# Altium PCB 101-0000212_UBERCLOCK_CRYSTAL_FILTER.PcbDoc
Units mm, origin at the board's own origin, x right, y up, seen from the top; angles counter-clockwise.
Board outline 100 x 100 mm, 4 copper layers (Top Layer, Layer 1, Layer 2, Bottom Layer), stack 1.586 mm thick; 55 components, 20 nets, 112 pads, 89 vias.
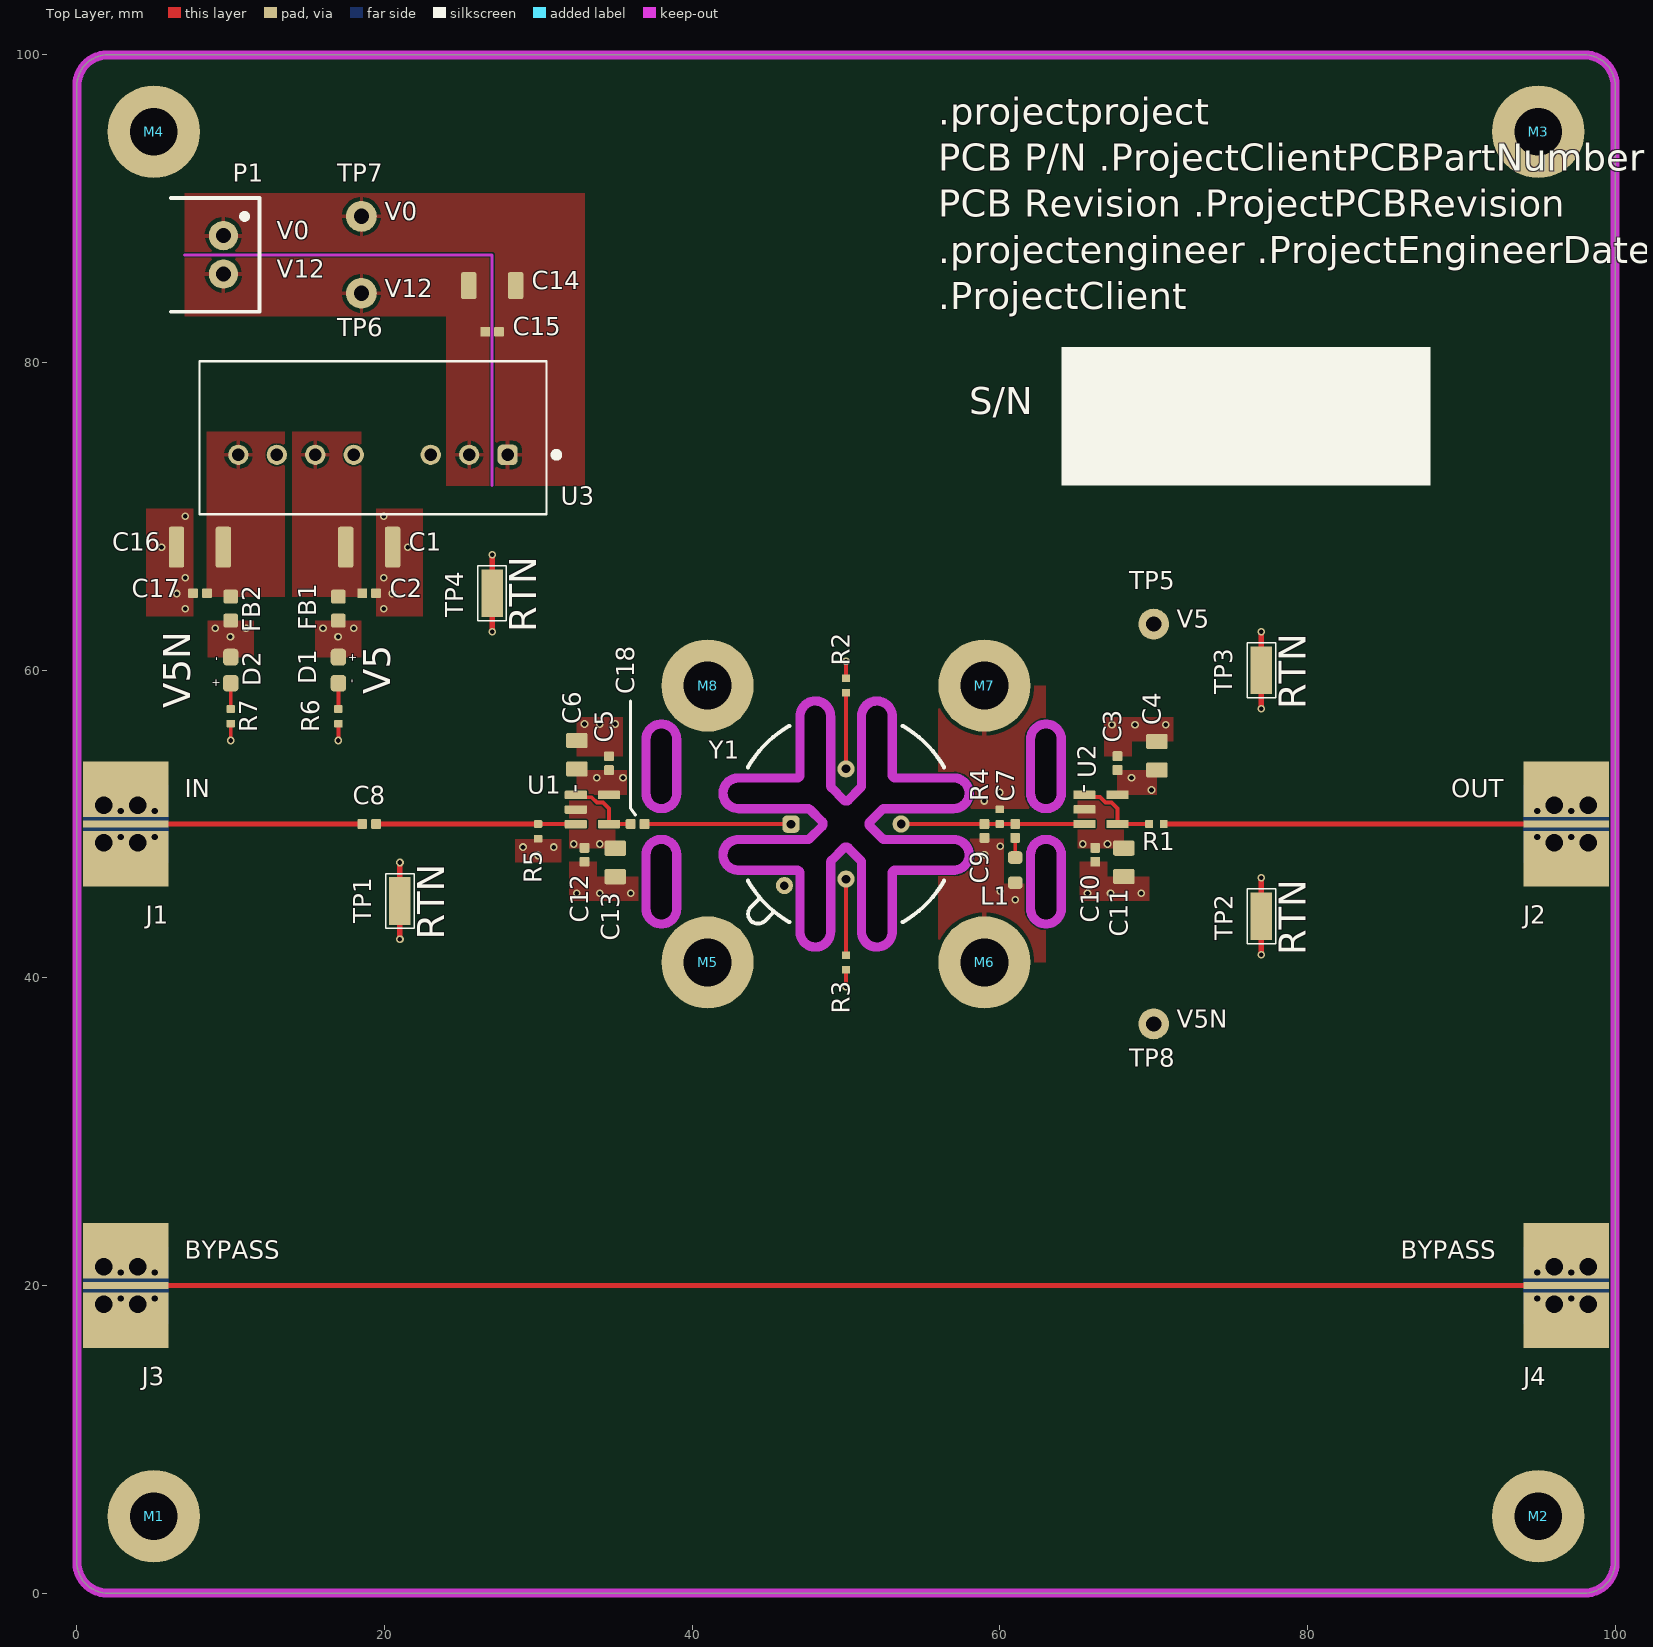
[diagram p0: Top Layer view]
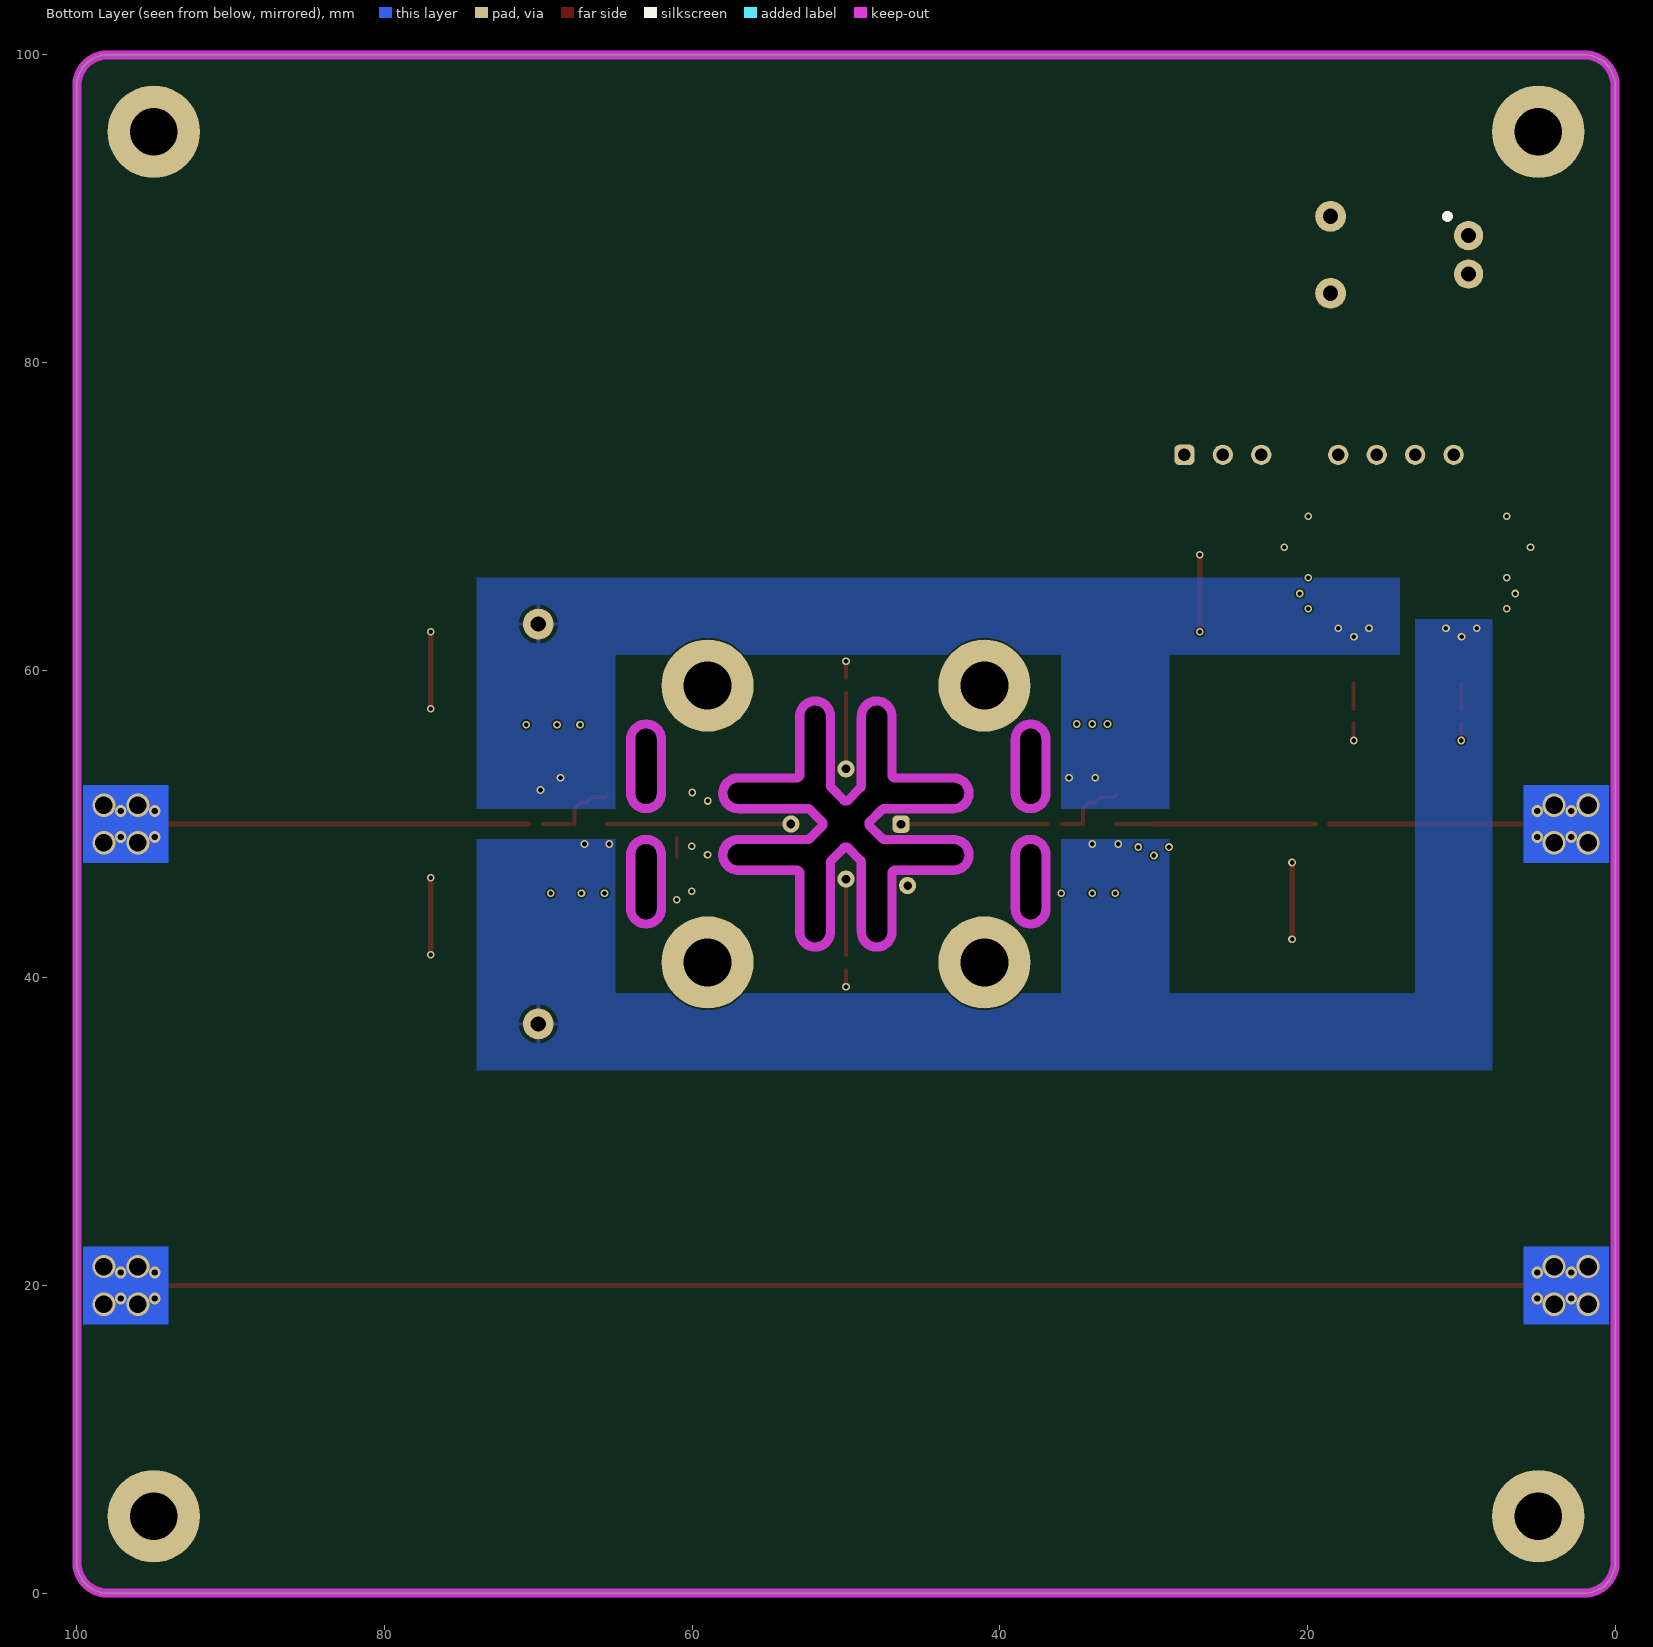
[diagram p1: Bottom Layer view, seen from below]
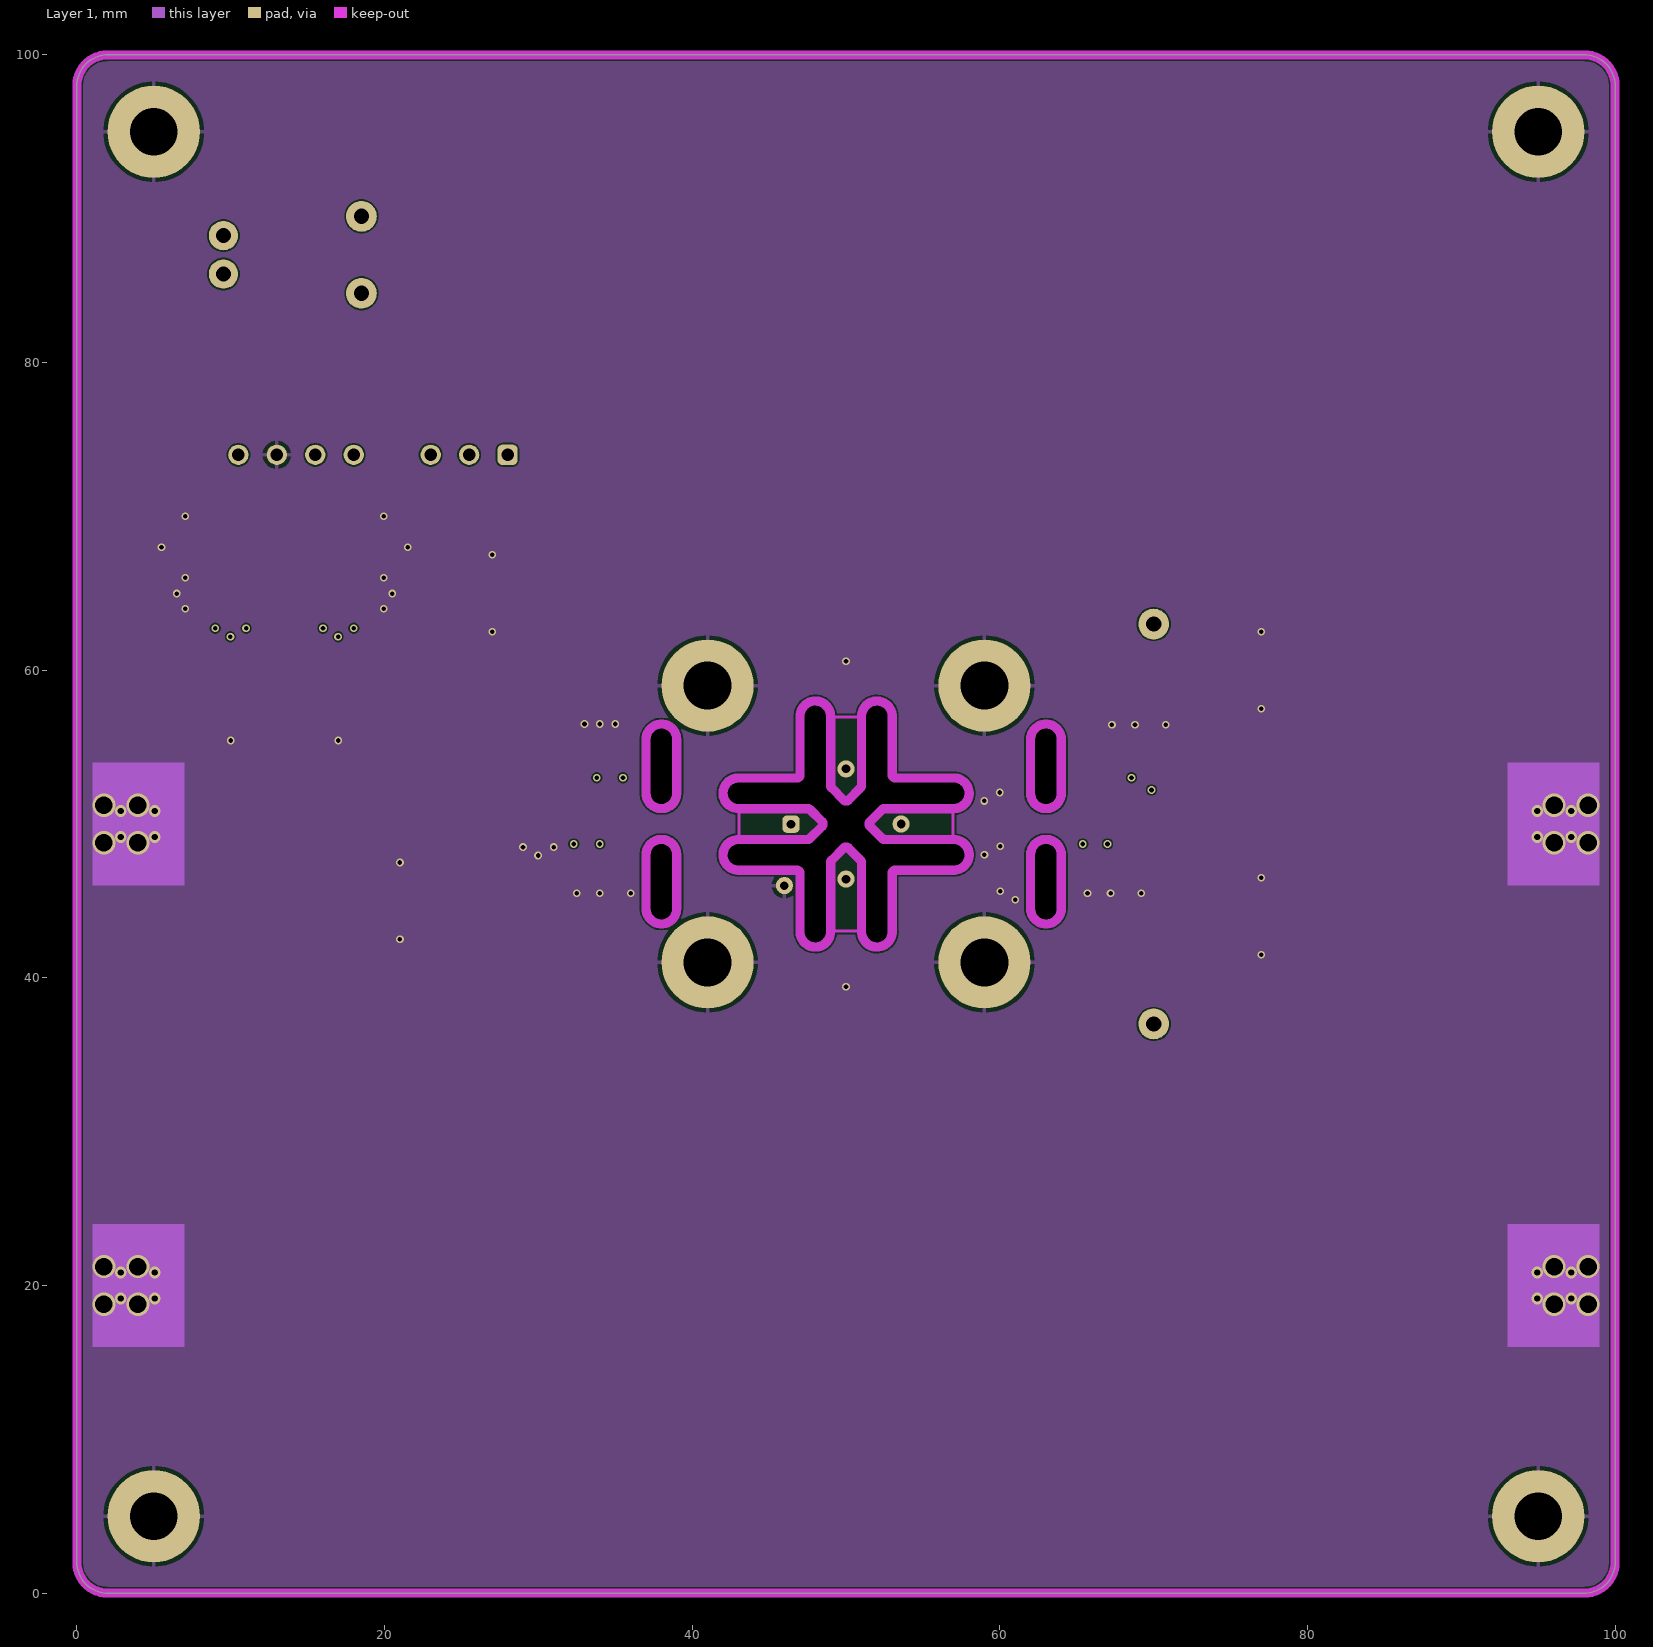
[diagram p2: Layer 1]
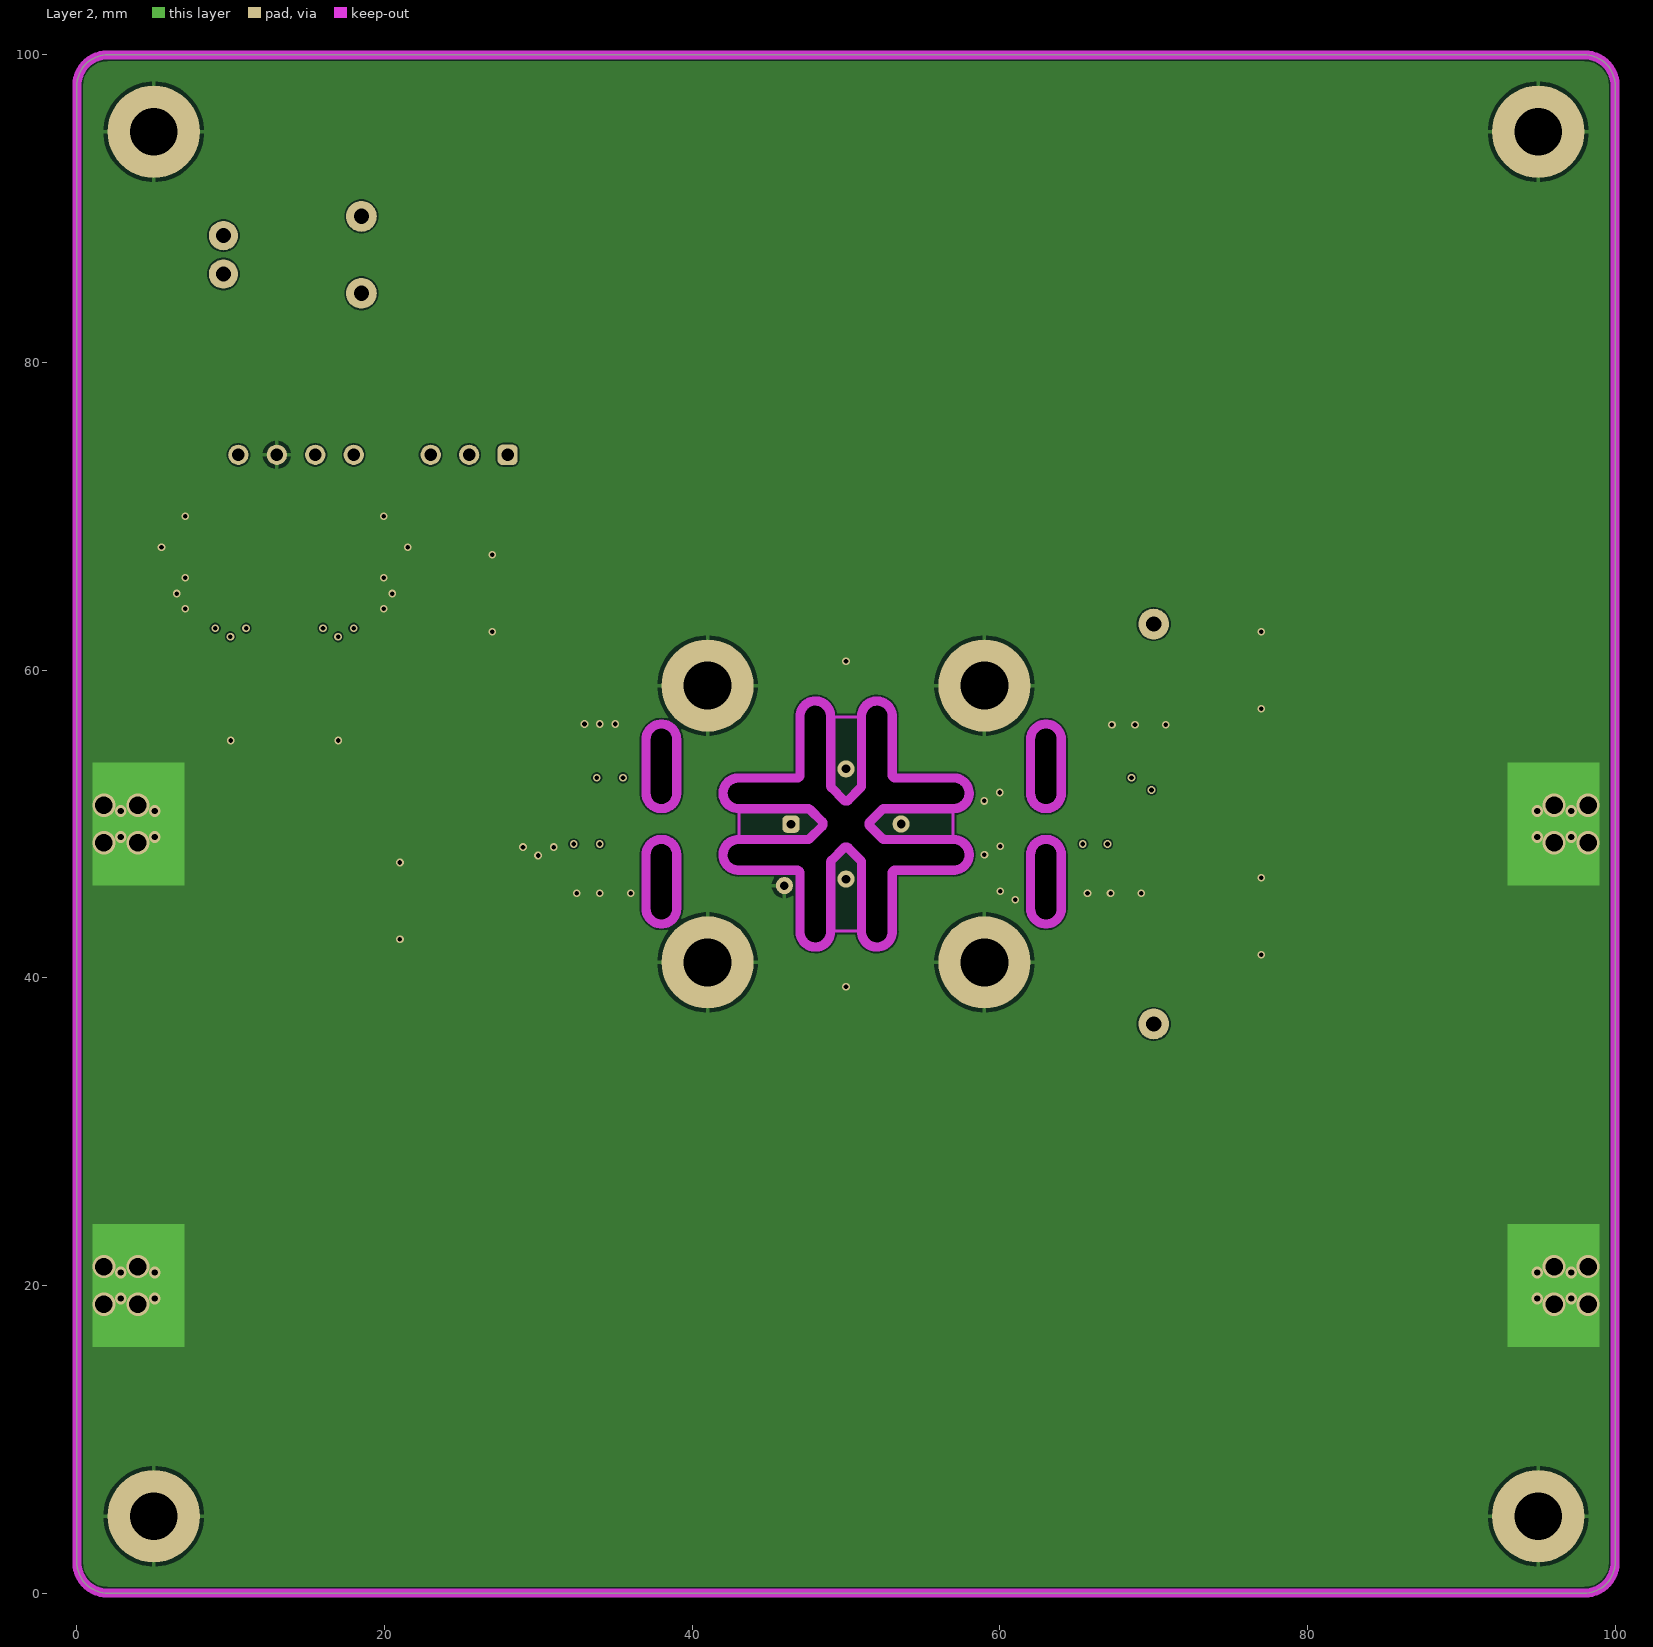
[diagram p3: Layer 2]
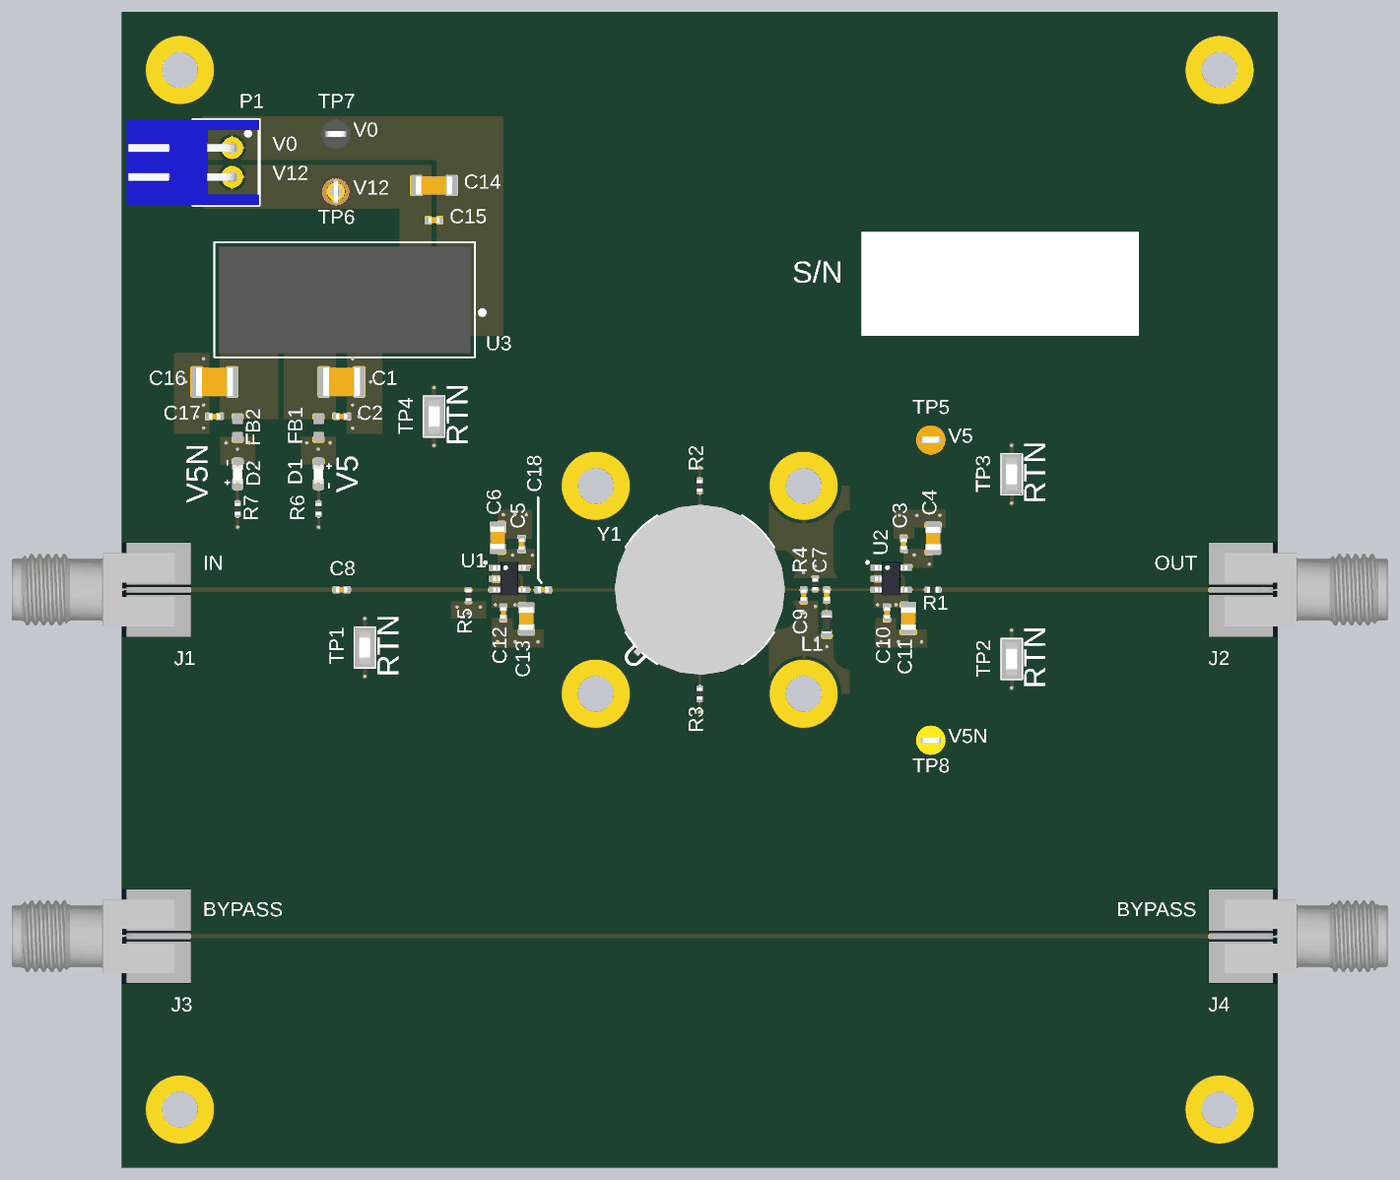
[diagram p4: 3D render of the assembled board from above, using the file's embedded part models]

## Layer stack, top to bottom
Top Solder: solder mask 0.0152, Solder Resist, Dk 3.8
Top Layer: signal copper 0.035
Prepreg 1: prepreg 0.2104, NP-155F, Dk 4.4
Layer 1: signal copper 0.0152
Core: core 1.065, NP-155F, Dk 4.43
Layer 2: signal copper 0.0152
Prepreg 2: prepreg 0.2104, NP-155F, Dk 4.4
Bottom Layer: signal copper 0.035
Bottom Solder: solder mask 0.0152, Solder Resist, Dk 3.8

## Board outline
0,2 ccw(c2,2) 2,0 98,0 ccw(c98,2) 100,2 100,98 ccw(c98,98) 98,100 2,100 ccw(c2,98) 0,98
cut-out: 37,44.5 ccw(c38,44.5) 39,44.5 39,48 ccw(c38,48) 37,48
cut-out: 37,52 ccw(c38,52) 39,52 39,55.5 ccw(c38,55.5) 37,55.5
cut-out: 62,52 62,55.5 cw(c63,55.5) 64,55.5 64,52 cw(c63,52)
cut-out: 62,44.5 ccw(c63,44.5) 64,44.5 64,48 ccw(c63,48) 62,48
cut-out: 42.252,47.341 cw(c42.998,47.996) 42.011,47.886 cw(c43.006,47.997) 42.006,47.957 cw(c43.015,47.997) 42.005,48.008 cw(c43.029,47.997) 42.006,48.049 cw(c43.044,47.996) 42.009,48.085 cw(c43.044,47.996) 42.012,48.117 cw(c43.059,47.994) 42.016,48.145 cw(c43.066,47.993) 42.02,48.172 cw(c43.071,47.992) 42.025,48.199 cw(c42.939,48.019) 42.098,48.421 cw(c42.949,48.014) 42.127,48.477 cw(c42.956,48.011) 42.153,48.52 cw(c42.966,48.004) 42.178,48.556 cw(c42.976,47.997) 42.202,48.59 cw(c42.983,47.992) 42.227,48.621 cw(c42.988,47.987) 42.253,48.651 cw(c42.992,47.984) 42.279,48.679 cw(c43.005,47.971) 42.308,48.707 cw(c43.012,47.964) 42.337,48.734 cw(c43.017,47.958) 42.37,48.762 cw(c43.024,47.95) 42.406,48.79 cw(c43.028,47.945) 42.449,48.819 cw(c43.037,47.932) 42.499,48.851 cw(c43.042,47.923) 42.568,48.888 cw(c43.048,47.91) 42.778,48.965 cw(c43.048,47.912) 43.048,48.999 47.51,48.999 ccw(c47.51,49.199) 47.651,49.057 48.453,49.856 ccw(c48.31,49.999) 48.46,49.863 ccw(c48.312,49.998) 48.469,50.121 ccw(c48.313,49.999) 48.46,50.131 ccw(c48.309,49.995) 48.453,50.139 47.655,50.937 ccw(c47.513,50.796) 47.513,50.996 43.048,50.996 cw(c43.048,52.085) 42.6,51.092 cw(c43.044,52.076) 42.519,51.133 cw(c43.037,52.064) 42.463,51.167 cw(c43.032,52.057) 42.418,51.197 cw(c43.027,52.05) 42.379,51.226 cw(c43.021,52.041) 42.345,51.254 cw(c43.011,52.03) 42.314,51.282 cw(c43.01,52.028) 42.285,51.31 cw(c43,52.018) 42.258,51.338 cw(c42.989,52.008) 42.233,51.367 cw(c42.984,52.004) 42.207,51.398 cw(c42.976,51.998) 42.182,51.432 cw(c42.969,51.993) 42.157,51.468 cw(c42.962,51.988) 42.132,51.51 cw(c42.941,51.977) 42.025,51.796 cw(c43.072,52.003) 42.02,51.819 cw(c43.059,52.001) 42.016,51.846 cw(c43.067,52.002) 42.012,51.874 cw(c43.055,52) 42.009,51.906 cw(c43.04,51.999) 42.006,51.942 cw(c43.029,51.998) 42.005,51.983 cw(c43.013,51.998) 42.005,52.034 cw(c42.995,51.999) 42.13,52.481 cw(c43.008,51.992) 42.386,52.781 cw(c43.005,51.996) 42.74,52.96 cw(c43.005,51.997) 42.888,52.989 cw(c43.006,51.985) 42.955,52.995 cw(c43.007,51.979) 43.007,52.996 46.807,52.996 ccw(c46.807,53.199) 46.817,52.996 ccw(c46.807,53.196) 47.006,53.172 ccw(c46.81,53.196) 47.007,53.185 ccw(c46.809,53.196) 47.007,53.196 47.007,56.997 cw(c48.029,56.997) 47.008,57.046 cw(c48.02,56.997) 47.014,57.116 cw(c48.005,56.999) 47.068,57.341 cw(c48.011,56.996) 47.348,57.75 cw(c48.005,57.005) 47.894,57.992 cw(c48.005,57.001) 47.965,57.998 cw(c48.005,56.991) 48.017,57.998 cw(c48.006,56.98) 48.058,57.997 cw(c48.006,56.981) 48.093,57.995 cw(c48.006,56.972) 48.125,57.991 cw(c48.003,56.949) 48.154,57.988 cw(c48.003,56.946) 48.18,57.983 cw(c48.003,56.945) 48.207,57.979 cw(c48.027,57.064) 48.428,57.905 cw(c48.024,57.057) 48.484,57.877 cw(c48.021,57.051) 48.527,57.851 cw(c48.017,57.044) 48.564,57.826 cw(c48.006,57.028) 48.597,57.802 cw(c48.001,57.022) 48.629,57.777 cw(c48.001,57.022) 48.658,57.752 cw(c47.997,57.016) 48.686,57.725 cw(c47.984,57.003) 48.714,57.697 cw(c47.978,56.996) 48.741,57.667 cw(c47.966,56.986) 48.769,57.634 cw(c47.962,56.982) 48.797,57.598 cw(c47.954,56.976) 48.827,57.556 cw(c47.942,56.968) 48.858,57.505 cw(c47.932,56.962) 48.895,57.436 cw(c47.918,56.955) 48.973,57.225 cw(c47.921,56.955) 49.007,56.956 49.007,52.49 ccw(c49.207,52.49) 49.066,52.348 49.864,51.55 ccw(c50.01,51.696) 49.872,51.543 ccw(c50.006,51.692) 50.129,51.534 ccw(c50.005,51.692) 50.14,51.543 ccw(c50.003,51.694) 50.147,51.55 50.946,52.352 ccw(c50.804,52.493) 51.004,52.493 51.004,56.956 cw(c52.093,56.955) 51.101,57.403 cw(c52.084,56.96) 51.141,57.484 cw(c52.074,56.965) 51.175,57.541 cw(c52.064,56.971) 51.206,57.586 cw(c52.054,56.979) 51.235,57.624 cw(c52.046,56.985) 51.263,57.659 cw(c52.036,56.994) 51.291,57.69 cw(c52.031,56.999) 51.319,57.718 cw(c52.025,57.005) 51.347,57.745 cw(c52.012,57.019) 51.376,57.771 cw(c52.012,57.02) 51.407,57.796 cw(c52.005,57.029) 51.44,57.821 cw(c51.999,57.038) 51.477,57.846 cw(c51.994,57.045) 51.518,57.871 cw(c51.985,57.062) 51.804,57.978 cw(c52.012,56.927) 51.829,57.983 cw(c52.011,56.93) 51.856,57.987 cw(c52.007,56.958) 51.884,57.991 cw(c52.006,56.97) 51.916,57.994 cw(c52.006,56.971) 51.952,57.997 cw(c52.006,56.983) 51.993,57.998 cw(c52.006,56.994) 52.045,57.998 cw(c52.008,57.008) 52.487,57.874 cw(c52,56.995) 52.791,57.616 cw(c52.005,56.998) 52.969,57.263 cw(c52.004,56.998) 52.997,57.116 cw(c51.994,56.997) 53.003,57.048 cw(c51.987,56.997) 53.004,56.997 53.004,53.196 ccw(c53.208,53.196) 53.005,53.186 ccw(c53.204,53.196) 53.18,52.997 ccw(c53.204,53.197) 53.194,52.996 ccw(c53.204,53.198) 53.204,52.996 57.005,52.996 cw(c57.005,51.974) 57.055,52.995 cw(c57.006,51.985) 57.124,52.989 cw(c57.007,51.998) 57.346,52.937 cw(c57.004,51.993) 57.76,52.654 cw(c57.014,51.998) 58.001,52.109 cw(c57.006,51.998) 58.006,52.038 cw(c56.998,51.998) 58.007,51.987 cw(c56.988,51.998) 58.005,51.946 cw(c56.974,51.998) 58.003,51.91 cw(c56.962,51.999) 58,51.878 cw(c56.952,52.001) 57.996,51.849 cw(c56.953,52) 57.992,51.823 cw(c56.927,52.005) 57.987,51.796 cw(c57.072,51.976) 57.914,51.575 cw(c57.063,51.981) 57.885,51.519 cw(c57.057,51.984) 57.859,51.476 cw(c57.044,51.992) 57.835,51.439 cw(c57.044,51.992) 57.81,51.406 cw(c57.037,51.997) 57.785,51.375 cw(c57.021,52.01) 57.76,51.345 cw(c57.017,52.013) 57.734,51.317 cw(c57.008,52.022) 57.705,51.289 cw(c57.001,52.029) 57.675,51.262 cw(c56.999,52.031) 57.643,51.234 cw(c56.989,52.043) 57.606,51.206 cw(c56.981,52.054) 57.564,51.177 cw(c56.977,52.059) 57.513,51.145 cw(c56.969,52.073) 57.445,51.108 cw(c56.964,52.085) 57.234,51.03 cw(c56.964,52.083) 56.964,50.996 52.498,50.996 ccw(c52.498,50.796) 52.357,50.937 51.559,50.139 ccw(c51.704,49.994) 51.552,50.132 ccw(c51.7,49.998) 51.543,49.874 ccw(c51.701,49.999) 51.552,49.864 ccw(c51.704,50.002) 51.559,49.856 52.36,49.057 ccw(c52.501,49.199) 52.501,48.999 56.964,48.999 cw(c56.963,47.91) 57.412,48.903 cw(c56.968,47.919) 57.493,48.862 cw(c56.973,47.929) 57.549,48.828 cw(c56.981,47.941) 57.594,48.798 cw(c56.987,47.949) 57.633,48.769 cw(c56.996,47.961) 57.667,48.74 cw(c57.003,47.968) 57.698,48.713 cw(c57.014,47.979) 57.727,48.685 cw(c57.021,47.986) 57.753,48.657 cw(c57.026,47.989) 57.779,48.628 cw(c57.031,47.994) 57.804,48.596 cw(c57.038,47.999) 57.829,48.563 cw(c57.046,48.005) 57.854,48.527 cw(c57.057,48.011) 57.879,48.485 cw(c57.071,48.018) 57.987,48.199 cw(c56.923,47.989) 57.991,48.176 cw(c56.949,47.994) 57.995,48.149 cw(c56.971,47.997) 57.999,48.121 cw(c56.977,47.997) 58.003,48.089 cw(c56.987,47.997) 58.005,48.053 cw(c56.988,47.997) 58.007,48.012 cw(c56.999,47.997) 58.006,47.96 cw(c57.017,47.996) 57.882,47.514 cw(c57.004,48.003) 57.624,47.212 cw(c57.006,47.999) 57.272,47.035 cw(c57.007,47.999) 57.124,47.006 cw(c57.005,48.012) 57.057,47 cw(c57.005,48.02) 57.005,46.999 53.204,46.999 ccw(c53.204,46.8) 53.194,46.999 ccw(c53.204,46.799) 53.006,46.823 ccw(c53.203,46.799) 53.005,46.809 ccw(c53.206,46.799) 53.004,46.799 53.004,42.998 cw(c51.987,42.998) 53.003,42.948 cw(c51.993,42.998) 52.997,42.879 cw(c52.006,42.996) 52.946,42.659 cw(c52.001,42.999) 52.662,42.243 cw(c52.007,42.989) 52.117,42.003 cw(c52.007,42.996) 52.046,41.997 cw(c52.006,43.006) 51.995,41.996 cw(c52.006,43.019) 51.954,41.998 cw(c52.007,43.027) 51.918,42 cw(c52.007,43.034) 51.886,42.003 cw(c52.01,43.057) 51.858,42.007 cw(c52.009,43.051) 51.831,42.011 cw(c52.014,43.082) 51.804,42.016 cw(c51.984,42.931) 51.582,42.09 cw(c51.988,42.939) 51.527,42.119 cw(c51.994,42.949) 51.484,42.145 cw(c51.998,42.956) 51.447,42.169 cw(c52.005,42.966) 51.413,42.194 cw(c52.011,42.973) 51.382,42.219 cw(c52.016,42.979) 51.353,42.244 cw(c52.028,42.993) 51.324,42.271 cw(c52.032,42.997) 51.296,42.299 cw(c52.039,43.004) 51.269,42.329 cw(c52.047,43.01) 51.242,42.362 cw(c52.054,43.016) 51.214,42.398 cw(c52.063,43.022) 51.184,42.44 cw(c52.072,43.029) 51.153,42.491 cw(c52.082,43.034) 51.116,42.56 cw(c52.093,43.04) 51.038,42.77 cw(c52.091,43.039) 51.004,43.039 51.004,47.502 ccw(c50.804,47.502) 50.946,47.643 50.147,48.444 ccw(c50.009,48.307) 50.14,48.451 ccw(c50.006,48.303) 49.882,48.461 ccw(c50.005,48.304) 49.872,48.452 ccw(c50.007,48.301) 49.864,48.445 49.066,47.647 ccw(c49.207,47.505) 49.007,47.505 49.007,43.039 cw(c47.918,43.04) 48.911,42.592 cw(c47.928,43.035) 48.87,42.51 cw(c47.938,43.03) 48.836,42.454 cw(c47.946,43.024) 48.806,42.409 cw(c47.957,43.017) 48.777,42.37 cw(c47.965,43.01) 48.749,42.336 cw(c47.971,43.005) 48.721,42.305 cw(c47.986,42.991) 48.693,42.276 cw(c47.99,42.986) 48.665,42.25 cw(c47.992,42.984) 48.636,42.224 cw(c47.999,42.975) 48.605,42.199 cw(c48.005,42.968) 48.572,42.174 cw(c48.012,42.958) 48.535,42.149 cw(c48.017,42.951) 48.493,42.124 cw(c48.027,42.932) 48.207,42.016 cw(c48,43.065) 48.184,42.012 cw(c48.001,43.064) 48.158,42.008 cw(c48.002,43.053) 48.129,42.004 cw(c48.004,43.042) 48.097,42.001 cw(c48.004,43.032) 48.061,41.998 cw(c48.005,43.017) 48.02,41.997 cw(c48.006,43.009) 47.969,41.997 cw(c48.004,42.987) 47.523,42.121 cw(c48.011,42.999) 47.222,42.378 cw(c48.007,42.997) 47.043,42.731 cw(c48.007,42.996) 47.014,42.879 cw(c48.019,42.998) 47.008,42.947 cw(c48.028,42.998) 47.007,42.998 47.007,46.799 ccw(c46.804,46.799) 47.007,46.809 ccw(c46.807,46.799) 46.832,46.997 ccw(c46.808,46.802) 46.818,46.999 ccw(c46.807,46.801) 46.807,46.999 43.007,46.999 cw(c43.007,48.02) 42.957,47 cw(c43.006,48.012) 42.888,47.006 cw(c43.004,47.997) 42.667,47.057 cw(c43.007,48.002)

## Design rules (kind name [scope] priority, off if disabled: settings)
Clearance [All] p1: gap=0.1 ignorepadtopadclearanceinfootprint=FALSE
HoleSize [All] p1: absolutevalues=TRUE maxlimit=25.4 minlimit=0.254 maxpercent=80.000 minpercent=20.000
MinimumAnnularRing [All] p1: minimumring=0.1
MinimumSolderMaskSliver [All] p1: minsoldermaskwidth=0.1
PolygonConnect [All] p1: thpad.connectstyle=Relief thpad.reliefconductorwidth=0.254 thpad.reliefentries=4 thpad.polygonreliefangle="90 Angle" thpad.airgapwidth=0.254 smdpad.connectstyle=Direct smdpad.reliefconductorwidth=0.254 smdpad.reliefentries=4 smdpad.polygonreliefangle="90 Angle" smdpad.airgapwidth=0.254 via.connectstyle=Direct via.reliefconductorwidth=0.254 via.reliefentries=4 via.polygonreliefangle="90 Angle" via.airgapwidth=0.254
RoutingVias [All] p1: holewidth=0.254 width=0.508 viastyle="Through Hole" minholewidth=0.254 minwidth=0.508 maxholewidth=0.711 maxwidth=1.27
SilkToSilkClearance [All] p1: silktosilkclearance=0.1
SilkToSolderMaskClearance SilkscreenOverComponentPads [IsPad] p1: minsilkscreentomaskgap=0.1 clearancetoexposedcopper=TRUE
SolderMaskExpansion [All] p1: expansion=0.05 istentingtop=FALSE
Width "50-Ohm TL" [InNetClass('Z50')] p1: maxlimit=0.349 minlimit=0.254 preferedwidth=0.349 toplayer_minwidth=0.349 bottomlayer_minwidth=0.349 impedanceprofiledriven=TRUE impedanceprofileid={C1B0F405-1A36-49F5-8AF3-67B6DDAB0612} impedanceprofilevalue=50.000000 minimp=50.000000 maximp=50.000000 favimp=50.000000
Width [All] p2: maxlimit=500 minlimit=0.1 preferedwidth=0.1
26 further rules are at their usual default settings.

## Components (designator, comment, footprint, x,y, rotation, side; value= is the part's Value field where it differs from the comment)
C1 "CGA6P1X7S1A476M250AC" CAPC3225X25N 19,68 r180 top value=47uF
C2 "CGA2B3X7R1V104K050BB" CAPC1005X05N 19,65 r0 top value=100nF
C3 "CGA2B3X7R1V104K050BB" CAPC1005X05N 67.65,53.96 r90 top value=100nF
C4 "CGA4J3X5R1E475K125AB" CAPC2012X125N 70.212,54.435 r270 top value=4.7uF
C5 "CGA2B3X7R1V104K050BB" CAPC1005X05N 34.588,53.95 r90 top value=100nF
C6 "CGA4J3X5R1E475K125AB" CAPC2012X125N 32.5,54.5 r270 top value=4.7uF
C7 "CGA2B2C0G1H180J050BA" CAPC1005X05N 61,49.55 r90 top value=18pF
C8 "CGA2B3X7R1V104K050BB" CAPC1005X05N 19,50 r180 top value=100nF
C9 "CGA2B2C0G1H180J050BA" CAPC1005X05N 59,49.55 r90 top value=18pF
C10 "CGA2B3X7R1V104K050BB" CAPC1005X05N 66.2,48 r270 top value=100nF
C11 "CGA4J3X5R1E475K125AB" CAPC2012X125N 68.062,47.51 r90 top value=4.7uF
C12 "CGA2B3X7R1V104K050BB" CAPC1005X05N 33,48 r270 top value=100nF
C13 "CGA4J3X5R1E475K125AB" CAPC2012X125N 35,47.5 r90 top value=4.7uF
C14 "CGA5L3X5R1V106M160AB" CAPC3216X16N 27,85 r180 top value=10uF
C15 "CGA2B3X7R1V104K050BB" CAPC1005X05N 27,82 r0 top value=100nF
C16 "CGA6P1X7S1A476M250AC" CAPC3225X25N 8,68 r0 top value=47uF
C17 "CGA2B3X7R1V104K050BB" CAPC1005X05N 8,65 r180 top value=100nF
C18 "CGA2B3X7R1V104K050BB" CAPC1005X05N 36.45,50 r180 top value=100nF
D1 "LTST-C191KGKT" 0603_LED 17,60 r270 top
D2 "LTST-C191KGKT" 0603_LED 10,60 r90 top
FB1 "BLM18AG102SN1" INDC1608X08N#1 17,64 r270 top
FB2 "BLM18AG102SN1" INDC1608X08N#1 10,64 r270 top
J1 "#NAME?" 901-10510-1 0,50 r180 top
J2 "#NAME?" 901-10510-1 100,50 r0 top
J3 "#NAME?" 901-10510-1 0,20 r180 top
J4 "#NAME?" 901-10510-1 100,20 r0 top
L1 "LQW18AN68NJ00D" INDC1608X08N#2 61,47 r270 top value=68nH
M1 "MOUNTM3" MOUNTM3 5,5 r0 top locked
M2 "MOUNTM3" MOUNTM3 95,5 r0 top locked
M3 "MOUNTM3" MOUNTM3 95,95 r0 top locked
M4 "MOUNTM3" MOUNTM3 5,95 r0 top locked
M5 "MOUNTM3" MOUNTM3 41,41 r0 top locked
M6 "MOUNTM3" MOUNTM3 59,41 r0 top locked
M7 "MOUNTM3" MOUNTM3 59,59 r0 top locked
M8 "MOUNTM3" MOUNTM3 41,59 r0 top locked
P1 "S2B-XH-A" S2B-XH-A 9,87 r270 top
R1 "ERJ-2RKF49R9X" RESC1005X035N 70.175,50 r180 top value=49.9
R2 "ERJ-2RKF1004X" RESC1005X035N 50,59 r90 top value=1M
R3 "ERJ-2RKF1004X" RESC1005X035N 50,41 r270 top value=1M
R4 "ERJ-2RKF1004X" RESC1005X035N 60,50.475 r270 top value=1M
R5 "ERJ-2RKF49R9X" RESC1005X035N 29.981,49.525 r90 top value=49.9
R6 "ERJ-2RKF1001X" RESC1005X035N 17,57 r270 top value=1k
R7 "ERJ-2RKF1001X" RESC1005X035N 10,57 r270 top value=1k
TP1 "5015" 5015 21,45 r90 top
TP2 "5015" 5015 77,44 r90 top
TP3 "5015" 5015 77,60 r90 top
TP4 "5015" 5015 27,65 r90 top
TP5 "#NAME?" 5003 70,63 r0 top
TP6 "#NAME?" 5000 18.5,84.5 r0 top
TP7 "#NAME?" 5001 18.5,89.5 r0 top
TP8 "#NAME?" 5004 70,37 r0 top
U1 "AD8065ARTZ-REEL7" SOT23-5 33.513,50.94 r270 top
U2 "AD8065ARTZ-REEL7" SOT23-5 66.575,50.95 r270 top
U3 "DPBW03F-05" SPBW03F-05_MWU 28,74 r180 top
Y1 "311205346" 311205346 50,50 r180 top

## Footprints (in the part's own frame and the unit in brackets; to place one, negate y for a bottom-side part, rotate by r counter-clockwise, add the part's x,y. Pads: shape width x height; smd on the part's side, far side on the other; paste and mask are expansions set on the pad)
0603_LED [mm] "SMD; Body 1.6 x 0.9 mm (LxW typ)"
  rrect50% 1.1x1 smd: 1(-0.85,0) 2(0.85,0)
  body extent -0.8,-0.4 0.8,0.4, height 0.55
901-10510-1 [mm] "SMA Board Edge Connector Female"
  rect 5.54x0.483 smd mask-0.241: 1(-3.17,0)
  rect 5.54x3.61 smd mask+0.05: 2(-3.17,2.26) 2(-3.17,-2.26)
  Bottom Layer region: -5.94,-2.54 -0.4,-2.54 -0.4,2.54 -5.94,2.54
  body extent -4.55,-3.18 9.53,3.17, height 3.3
5000 [mm] "Thruhole Mount Test Point, 4.6mm Tall, Red"
  round 2 hole 1: 1(0,0)
  body extent -1.27,-1.3 1.27,1.24, height 4.89
5001 [mm] "Thruhole Mount Test Point, 4.6mm Tall, Black"
  round 2 hole 1: 1(0,0)
  body extent -1.27,-1.3 1.27,1.24, height 4.57
5003 [mm] "Thruhole Mount Test Point, 4.6mm Tall, Orange"
  round 2 hole 1: 1(0,0)
  body extent -1.27,-1.3 1.27,1.24, height 4.57
5004 [mm] "Thruhole Mount Test Point, 4.6mm Tall, Yellow"
  round 2 hole 1: 1(0,0)
  body extent -1.27,-1.3 1.27,1.24, height 4.57
5015 [mm] "Test Point SMT"
  rect 3.1x1.4 smd paste+0.2 mask+0.05: 1(0,0)
  silkscreen extent -1.78,-0.92 1.78,0.92, body extent -1.45,-0.5 1.45,0.5, height 2
311205346 [mil]
  rrect50% 44x44 hole 22: 1(140.73,0.4)
  round 44 hole 22: 2(0,-141) 3(-141,0) 4(0,141) 5(157.61,157.61)
  silkscreen extent -251,-251 251,255, body extent -290,-290 289,290, height 312
CAPC1005X05N [mm] "Chip Capacitor, 2-Leads, Body 1.00x0.50mm, IPC Medium Density"
  rrect25% 0.64x0.64 smd mask+0.05: 1(-0.45,0) 2(0.45,0)
  body extent -0.5,-0.25 0.5,0.25, height 0.5
CAPC2012X125N [mm] "Chip Capacitor, 2-Leads, Body 2.00x1.25mm, IPC Medium Density"
  rrect25% 1x1.4 smd mask+0.05: 1(-0.925,0) 2(0.925,0)
  body extent -1,-0.63 1,0.63, height 1.25
CAPC3216X16N [mm] "Chip Capacitor, 2-Leads, Body 3.20x1.60mm, IPC Medium Density"
  rrect25% 1x1.75 smd mask+0.05: 1(-1.525,0) 2(1.525,0)
  body extent -1.6,-0.8 1.6,0.8, height 1.6
CAPC3225X25N [mm] "Chip Capacitor, 2-Leads, Body 3.20x2.50mm, IPC Medium Density"
  rrect25% 1x2.65 smd mask+0.05: 1(-1.525,0) 2(1.525,0)
  body extent -1.6,-1.25 1.6,1.25, height 2.5
INDC1608X08N#1 [mm] "Chip Inductor, 2-Leads, Body 1.60x0.80mm, IPC Medium Density"
  rrect25% 0.9x0.94 smd mask+0.05: 1(-0.78,0) 2(0.78,0)
  body extent -0.8,-0.4 0.8,0.4, height 0.8
INDC1608X08N#2 [mm] "Chip Inductor, 2-Leads, Body 1.60x0.80mm, IPC Medium Density"
  rrect50% 0.82x0.94 smd mask+0.05: 1(-0.82,0) 2(0.82,0)
  body extent -0.8,-0.4 0.8,0.4, height 0.8
MOUNTM3 [mm]
  round 6 hole 3.1 paste-2539.97 mask-0.064: 1(0,0)
RESC1005X035N [mm] "Chip Resistor, 2-Leads, Body 1.00x0.50mm, IPC Medium Density"
  rrect25% 0.5x0.55 smd mask+0.05: 1(-0.475,0) 2(0.475,0)
  body extent -0.5,-0.25 0.5,0.25, height 0.35
S2B-XH-A [mm] "2.5mm pitch right angle 2-position"
  round 1.905 hole 0.965: 1(-1.25,0.525) 2(1.25,0.525)
  silkscreen extent -3.7,-2.88 3.7,2.88, body extent -3.7,-8.62 3.7,2.88, height 5.95
SOT23-5 [mm] "SOT-23/SC-74A; 5 Leads; Body 3 x 3 mm, inc. leads (LxW max)"
  rrect25% 0.55x1.45 smd mask+0.05: 1(-0.95,-1.075) 2(0,-1.075) 3(0.95,-1.075) 4(0.95,1.075) 5(-0.95,1.075)
  body extent -1.45,-1.4 1.45,1.4, height 1.45
SPBW03F-05_MWU [mil]
  rrect50% 52x52 hole 32 paste-99999 mask+0: 1(0,0)
  round 52 hole 32 paste-99999 mask+0: 2(98.43,0) 3(196.85,0) 5(393.7,0) 6(492.13,0) 7(590.55,0) 8(688.98,0)
  silkscreen extent -130,-240 788,152, body extent -85,-224 773,138, height 437

## Part data
C1 C16: "CAPACITOR CERAMIC 47UF 20% 10V X7S 1210", Tolerance=20%, Voltage=10V, MFG=TDK, MPN=CGA6P1X7S1A476M250AC, Qual=AEC-Q200, TCR=+/-22%, Tr=–55:125
C2 C3 C5 C8 C10 C12 C15 C17 C18: "CAPACITOR CERAMIC 100NF 10% 35V X7R 0402", Package=0402, Tolerance=10%, Voltage=35V, MFG=TDK, MPN=CGA2B3X7R1V104K050BB, Qual=AEC-Q200, TCR=+/-15%, Tr=–55:125
C4 C6 C11 C13: "CAPACITOR CERAMIC 4.7UF 10% 25V X5R 0805", Tolerance=10%, Voltage=25V, MFG=TDK, MPN=CGA4J3X5R1E475K125AB, Qual=AEC-Q200, TCR=+/-15%, Tr=–55:85
C7 C9: "CAPACITOR CERAMIC 18PF 5% 50V C0G 0402", Package=0402, Tolerance=5%, Voltage=50V, MFG=TDK, MPN=CGA2B2C0G1H180J050BA, Qual=AEC-Q200, TCR=+/-30, Tr=–55:125
C14: "CAPACITOR CERAMIC 10UF 20% 35V X5R 1206", Tolerance=20%, Voltage=35V, MFG=TDK, MPN=CGA5L3X5R1V106M160AB, Qual=AEC-Q200, TCR=+/-15%, Tr=–55:85
D1 D2: "LED GREEN CLEAR SMD", Color=Green, MFG="LITE-ON INC", MPN=LTST-C191KGKT
FB1 FB2: "FERRITE BEAD 1000-OHM 450MA 0603", Current=450mA, DCR=0.5, Imedance="1000-OHM @ 100MHz", MFG=MURATA, MPN=BLM18AG102SN1, Tr=-55:125
J1 J2 J3 J4: library part 901-10510-1, "SMA Board Edge Connector Female", MFG=AMPHENOL, MPN=901-10510-1, Notes="SMA Female Receptacle"
L1: "FIXED IND 68NH 340MA 0.38OHM SMD", Package=0603, MFG=MURATA, MPN=LQW18AN68NJ00D
M1 M2 M3 M4 M5 M6 M7 M8: "M3 MOUNTING HOLE"
P1: "CONN HEADER R/A 2POS 2.5MM", MFG=JST, MPN=S2B-XH-A
R1 R5: "RESISTOR THICK FILM 49.9 OHM 1% 0402", Package=0402, Tolerance=1%, Voltage=50V, MFG=PANASONIC, MPN=ERJ-2RKF49R9X, Qual="AEC-Q200 GRADE 0", TCR=+/-100, Tr=-55:155
R2 R3 R4: "RESISTOR THICK FILM 1M OHM 1% 0402", Package=0402, Tolerance=1%, Voltage=50V, MFG=PANASONIC, MPN=ERJ-2RKF1004X, Qual="AEC-Q200 GRADE 0", TCR=+/-100, Tr=-55:155
R6 R7: "RESISTOR THICK FILM 1k OHM 1% 0402", Tolerance=1%, Voltage=50V, MFG=PANASONIC, MPN=ERJ-2RKF1001X, Qual="AEC-Q200 GRADE 0", TCR=+/-100, Tr=-55:155
TP1 TP2 TP3 TP4: "TEST POINT SMD", MFG=KEYSTONE, MPN=5015
TP5: library part 5003, "THRUHOLE MOUNT TEST POINT, 4.6MM TALL, ORANGE", MFG=KEYSTONE, MPN=5003, Notes=Orange
TP6: library part 5000, "THRUHOLE MOUNT TEST POINT, 4.6MM TALL, RED", MFG=KEYSTONE, MPN=5000, Notes=Red
TP7: library part 5001, "THRUHOLE MOUNT TEST POINT, 4.6MM TALL, BLACK", MFG=KEYSTONE, MPN=5001, Notes=Black
TP8: library part 5004, "THRUHOLE MOUNT TEST POINT, 4.6MM TALL, YELLOW", MFG=KEYSTONE, MPN=5004, Notes=Yellow
U1 U2: "IC OPAMP VFB 1 CIRCUIT SOT23-5", MFG="ANALOG DEVICES", MPN=AD8065ARTZ-REEL7
U3: library part SPBW03F-05, "DC DC CONVERTER +/-5V 3W", MFG="MEAN WELL", MPN=DPBW03F-05
Y1: "CUSTOM CRYSTAL RESONATOR", MFG=VECTRON, MPN=311205346

## Via types
v1: diameter 0.5, hole 0.3, Top Layer to Bottom Layer, tented top, 57 vias
v2: diameter 0.77, hole 0.4, Top Layer to Bottom Layer, tented bottom, 16 vias
v3: diameter 1.5, hole 1.14, Top Layer to Bottom Layer, 16 vias

## Nets (pads, with @x,y where several pads share a name; then routed paths per layer and width w, separated by ;. In a path a pad name is that pad's centre, name@x,y a point inside that pad or via, vN(x,y) a via of type N, cw(c..) or ccw(c..) an arc to the next point about the centre after c; other vN are vias at no path point)
BYPASS: J3.1 J4.1 | length 93.7
  Top Layer w0.349: J3.1 J4.1
NetC1_2: C1.2 C2.1 FB1.1 U3.6
NetC7_1: C7.1 L1.1 | length 1.3
  Top Layer w0.254: L1.1 C7.1
NetC8_1: C8.1 R5.2 U1.3 | length 13
  Top Layer w0.254: R5.2@29.986,49.995 32.433,49.995 U1.3
  Top Layer w0.349: C8.1 R5.2 R5.2@29.986,49.995
NetC16_2: C16.2 C17.1 FB2.1 U3.8
NetD1_2: D1.2 R6.1 | length 1.7
  Top Layer w0.254: R6.1 D1.2
NetD2_1: D2.1 R7.1 | length 1.7
  Top Layer w0.254: R7.1 D2.1
NetR2_1: R2.1 Y1.2 | length 4.9
  Top Layer w0.254: Y1.2 R2.1
NetR3_1: R3.1 Y1.4 | length 4.9
  Top Layer w0.254: R3.1 Y1.4
RTN: C1.1 C2.2 C3.2 C4.1 C5.2 C6.1 C9.1 C10.2 C11.1 C12.2 C13.1 C16.1 C17.2 J1.2 J2.2 J3.2 J4.2 L1.2 M1.1 M2.1 M3.1 M4.1 M5.1 M6.1 M7.1 M8.1 R2.2 R3.2 R4.1 R5.1 R6.2 R7.2 TP1.1 TP2.1 TP3.1 TP4.1 U3.7 Y1.5 | length 24.4
  Top Layer w0.254: v1(10,55.425) R7.2 ; v1(17,55.425) R6.2 ; v1(50,39.425) R3.2 ; R2.2 v1(50,60.575)
  Top Layer w0.349: v1(21,42.5) TP1.1 v1(21,47.5) ; v1(27,62.5) TP4.1 v1(27,67.5) ; v1(77,41.5) TP2.1 v1(77,46.5) ; v1(77,57.5) TP3.1 v1(77,62.5)
  other v1: 61,45.08 32.5,45.5 34,45.5 36,45.5 65.7,45.5 67.2,45.5 69.2,45.5 60.019,45.63 29.981,47.95 59,48 29,48.5 31,48.5 60.019,48.55 58.981,51.5 60,52.05 67.288,56.45 68.788,56.45 70.788,56.45 33,56.5 34,56.5 35,56.5 7.05,64 19.95,64 6.5,64.981 20.5,64.981 7.05,66 19.95,66 5.5,68 21.5,68 7.05,70 19.95,70
  other v2: 2.855,19.16 5.065,19.16 94.935,19.16 97.145,19.16 2.855,20.84 5.065,20.84 94.935,20.84 97.145,20.84 2.855,49.16 5.065,49.16 94.935,49.16 97.145,49.16 2.855,50.84 5.065,50.84 94.935,50.84 97.145,50.84
  other v3: 1.75,18.78 3.96,18.78 96.04,18.78 98.25,18.78 1.75,21.22 3.96,21.22 96.04,21.22 98.25,21.22 1.75,48.78 3.96,48.78 96.04,48.78 98.25,48.78 1.75,51.22 3.96,51.22 96.04,51.22 98.25,51.22
SIN: C8.2 J1.1 | length 15.4
  Top Layer w0.349: J1.1 C8.2
SIN_T: C18.2 U1.1 U1.4 | length 4.9
  Top Layer w0.254: U1.1 32.586,51.742 33.455,51.742 33.809,51.388 34.2,51.388 34.588,51 U1.4 C18.2@36,49.99
SOUT: J2.1 R1.1 | length 26.2
  Top Layer w0.349: R1.1 J2.1
SOUT_T: R1.2 U2.1 U2.4 | length 5.3
  Top Layer w0.254: U2.1 65.648,51.752 66.517,51.752 66.871,51.398 67.262,51.398 67.65,51.01 U2.4 ; U2.4@67.9,50 R1.2
V0: C14.1 C15.2 P1.1 TP7.1 U3.1
V5: C3.1 C4.2 C5.1 C6.2 D1.1 FB1.2 TP5.1 U1.5 U2.5
  other v1: 69.862,52.21 33.8,53 35.5,53 68.562,53.01 16.981,62.17 16,62.72 18,62.72
V5N: C10.1 C11.2 C12.1 C13.2 D2.2 FB2.2 TP8.1 U1.2 U2.2
  other v1: 32.3,48.7 34,48.7 65.4,48.7 67,48.7 9.981,62.17 9,62.72 11,62.72
V12: C14.2 C15.1 P1.2 TP6.1 U3.2
XIN: C18.1 Y1.1 | length 9.5
  Top Layer w0.254: C18.1@36.9,49.99 Y1.1
XOUT: C7.2 C9.2 R4.2 U2.3 Y1.3 | length 11.9
  Top Layer w0.254: Y1.3 C9.2 C7.2 U2.3
pads on no net: U3.3 U3.5

## Polygon pours and split planes (outlines as drawn)
RTN on Top Layer "TOP_RTN" (solid, remove dead copper, pour order 22): 7.55,70.5 7.55,63.5 4.5,63.5 4.5,70.5
RTN on Top Layer "TOP_RTN" (solid, remove dead copper, pour order 21): 19.45,70.5 19.45,63.5 22.5,63.5 22.5,70.5
V5N on Top Layer "TOP_V5N" (solid, remove dead copper, pour order 20): 11.5,63.22 8.5,63.22 8.5,60.85 11.5,60.85
V5 on Top Layer "TOP_V5" (solid, remove dead copper, pour order 19): 18.5,63.22 15.5,63.22 15.5,60.85 18.5,60.85
NetC16_2 on Top Layer "TOP_NetC16_2" (solid, remove dead copper, pour order 18): 8.45,75.5 13.5,75.5 13.5,64.78 8.45,64.78
NetC1_2 on Top Layer "TOP_NetC1_2" (solid, remove dead copper, pour order 17): 14,75.5 18.5,75.5 18.5,64.78 14,64.78
V12 on Top Layer "TOP_V12" (solid, remove dead copper, pour order 16): 27,72 27,87 7,87 7,83 24,83 24,72
V0 on Top Layer "TOP_V0" (solid, remove dead copper, pour order 15): 27,87 7,87 7,91 33,91 33,72 27,72
RTN on Top Layer "TOP_RTN" (solid, remove dead copper, pour order 14): 56,51 63,51 63,59 56,59
RTN on Top Layer "TOP_RTN" (solid, remove dead copper, pour order 12): 60.269,49.05 56,49.05 56,45.5 60.269,45.5
RTN on Top Layer "TOP_RTN" (solid, remove dead copper, pour order 11): 63,46.13 56,46.13 56,41 63,41
RTN on Top Layer "TOP_RTN" (solid, remove dead copper, pour order 10): 31.5,49 28.5,49 28.5,47.5 31.5,47.5
V5N on Top Layer "TOP_V5N" (solid, remove dead copper, pour order 2): 65.062,51.51 68.062,51.51 68.062,48.435 65.062,48.435
RTN on Top Layer "TOP_RTN" (solid, remove dead copper, pour order 7): 66.788,54.4 68.588,54.4 68.588,55.375 71.288,55.375 71.288,56.95 66.788,56.95
RTN on Top Layer "TOP_RTN" (solid, remove dead copper, pour order 6): 65.2,47.55 67,47.55 67,46.575 69.7,46.575 69.7,45 65.2,45
RTN on Top Layer "TOP_RTN" (solid, remove dead copper, pour order 5): 32.5,54.4 35.5,54.4 35.5,56.95 32.5,56.95
RTN on Top Layer "TOP_RTN" (solid, remove dead copper, pour order 4): 32,47.55 33.8,47.55 33.8,46.575 36.5,46.575 36.5,45 32,45
V5 on Top Layer "TOP_V5" (solid, remove dead copper, pour order 3): 67.65,53.51 70.212,53.51 70.212,51.9 67.65,51.9
V5N on Top Layer "TOP_V5N" (solid, remove dead copper, pour order 0): 32,51.5 35,51.5 35,48.425 32,48.425
V5 on Top Layer "TOP_V5" (solid, remove dead copper, pour order 1): 32.5,53.5 35.75,53.5 35.75,51.89 32.5,51.89
V5N on Bottom Layer "BOT_V5N" (solid, remove dead copper, pour order 24): 8,34 74,34 74,49 65,49 65,39 36,39 36,49 29,49 29,39 13,39 13,63.3 8,63.3
V5 on Bottom Layer "BOT_V5" (solid, remove dead copper, pour order 23): 14,66 74,66 74,51 65,51 65,61 36,61 36,51 29,51 29,61 14,61
RTN on Layer 1 "L2_RTN" (solid, remove dead copper, pour order 8): 0,2 0,98 cw(c2,98) 2,100 98,100 cw(c98,98) 100,98 100,2 cw(c98,2) 98,0 2,0 cw(c2,2)
RTN on Layer 2 "L2_RTN" (solid, remove dead copper, pour order 9): 0,2 0,98 cw(c2,98) 2,100 98,100 cw(c98,98) 100,98 100,2 cw(c98,2) 98,0 2,0 cw(c2,2)

## Keep-outs
Top Layer:
  lines w0.2: 7,87 27,87 27,72
Layer 1:
  lines w0.2: 43.048,48.999 43.048,50.996 ; 49.007,43.039 51.004,43.039 ; 49.007,56.956 51.004,56.956 ; 56.964,48.999 56.964,50.996
Layer 2:
  lines w0.2: 43.048,48.999 43.048,50.996 ; 49.007,43.039 51.004,43.039 ; 49.007,56.956 51.004,56.956 ; 56.964,48.999 56.964,50.996
Keep-Out Layer:
  lines w0.6: 0,2 ccw(c2,2) 2,0 98,0 ccw(c98,2) 100,2 100,98 ccw(c98,98) 98,100 2,100 ccw(c2,98) 0,98 0,2 ; 37,44.5 ccw(c38,44.5) 39,44.5 39,48 ccw(c38,48) 37,48 37,44.5 ; 37,52 ccw(c38,52) 39,52 39,55.5 ccw(c38,55.5) 37,55.5 37,52 ; 42.005,48.008 ccw(c43.016,47.997) 42.006,47.957 ccw(c43.005,47.997) 42.011,47.886 ccw(c42.998,47.996) 42.252,47.341 ccw(c43.007,48.002) 42.667,47.057 ccw(c43.004,47.997) 42.888,47.006 ccw(c43.006,48.01) 42.957,47 ccw(c43.007,48.02) 43.007,46.999 46.807,46.999 cw(c46.807,46.796) 46.818,46.999 cw(c46.807,46.798) 46.832,46.997 cw(c46.807,46.799) 47.007,46.809 cw(c46.804,46.799) 47.007,46.799 47.007,42.998 ccw(c48.029,42.998) 47.008,42.947 ccw(c48.018,42.998) 47.014,42.879 ccw(c48.007,42.996) 47.043,42.731 ccw(c48.007,42.997) 47.222,42.378 ccw(c48.011,42.999) 47.523,42.121 ccw(c48.004,42.986) 47.969,41.997 ccw(c48.005,43.008) 48.02,41.997 ccw(c48.005,43.019) 48.061,41.998 ccw(c48.005,43.029) 48.097,42.001 ccw(c48.004,43.04) 48.129,42.004 ccw(c48.003,43.051) 48.158,42.008 ccw(c48.001,43.061) 48.184,42.012 ccw(c47.999,43.072) 48.207,42.016 ccw(c48.027,42.933) 48.493,42.124 ccw(c48.017,42.95) 48.535,42.149 ccw(c48.012,42.959) 48.572,42.174 ccw(c48.006,42.967) 48.605,42.199 ccw(c48,42.975) 48.636,42.224 ccw(c47.993,42.983) 48.665,42.25 ccw(c47.986,42.99) 48.693,42.276 ccw(c47.979,42.997) 48.721,42.305 ccw(c47.971,43.005) 48.749,42.336 ccw(c47.963,43.011) 48.777,42.37 ccw(c47.955,43.018) 48.806,42.409 ccw(c47.946,43.024) 48.836,42.454 ccw(c47.937,43.03) 48.87,42.51 ccw(c47.927,43.036) 48.911,42.592 ccw(c47.918,43.04) 49.007,43.039 49.007,47.505 cw(c49.207,47.505) 49.066,47.647 49.864,48.445 cw(c50.008,48.301) 49.872,48.452 cw(c50.006,48.302) 49.882,48.461 cw(c50.006,48.303) 50.14,48.451 cw(c50.003,48.301) 50.147,48.444 50.946,47.643 cw(c50.804,47.502) 51.004,47.502 51.004,43.039 ccw(c52.091,43.039) 51.038,42.77 ccw(c52.093,43.04) 51.116,42.56 ccw(c52.081,43.034) 51.153,42.491 ccw(c52.072,43.029) 51.184,42.44 ccw(c52.063,43.023) 51.214,42.398 ccw(c52.054,43.016) 51.242,42.362 ccw(c52.046,43.01) 51.269,42.329 ccw(c52.039,43.003) 51.296,42.299 ccw(c52.031,42.996) 51.324,42.271 ccw(c52.024,42.989) 51.353,42.244 ccw(c52.017,42.981) 51.382,42.219 ccw(c52.011,42.973) 51.413,42.194 ccw(c52.005,42.965) 51.447,42.169 ccw(c51.999,42.957) 51.484,42.145 ccw(c51.994,42.949) 51.527,42.119 ccw(c51.989,42.94) 51.582,42.09 ccw(c51.984,42.931) 51.804,42.016 ccw(c52.012,43.071) 51.831,42.011 ccw(c52.01,43.06) 51.858,42.007 ccw(c52.009,43.049) 51.886,42.003 ccw(c52.008,43.039) 51.918,42 ccw(c52.007,43.028) 51.954,41.998 ccw(c52.006,43.018) 51.995,41.996 ccw(c52.006,43.007) 52.046,41.997 ccw(c52.007,42.997) 52.117,42.003 ccw(c52.007,42.989) 52.662,42.243 ccw(c52.001,42.999) 52.946,42.659 ccw(c52.006,42.996) 52.997,42.879 ccw(c51.993,42.998) 53.003,42.948 ccw(c51.983,42.998) 53.004,42.998 53.004,46.799 cw(c53.208,46.799) 53.005,46.809 cw(c53.206,46.799) 53.006,46.823 cw(c53.204,46.799) 53.194,46.999 cw(c53.204,46.795) 53.204,46.999 57.005,46.999 ccw(c57.005,48.02) 57.057,47 ccw(c57.005,48.01) 57.124,47.006 ccw(c57.007,47.999) 57.272,47.035 ccw(c57.006,47.999) 57.624,47.212 ccw(c57.004,48.003) 57.882,47.514 ccw(c57.017,47.996) 58.006,47.96 ccw(c56.995,47.997) 58.007,48.012 ccw(c56.984,47.997) 58.005,48.053 ccw(c56.974,47.996) 58.003,48.089 ccw(c56.963,47.995) 57.999,48.121 ccw(c56.952,47.994) 57.995,48.149 ccw(c56.942,47.993) 57.991,48.176 ccw(c56.931,47.991) 57.987,48.199 ccw(c57.071,48.018) 57.879,48.485 ccw(c57.053,48.009) 57.854,48.527 ccw(c57.044,48.003) 57.829,48.563 ccw(c57.036,47.997) 57.804,48.596 ccw(c57.028,47.991) 57.779,48.628 ccw(c57.021,47.985) 57.753,48.657 ccw(c57.013,47.978) 57.727,48.685 ccw(c57.006,47.971) 57.698,48.713 ccw(c56.999,47.963) 57.667,48.74 ccw(c56.992,47.955) 57.633,48.769 ccw(c56.985,47.947) 57.594,48.798 ccw(c56.979,47.938) 57.549,48.828 ccw(c56.973,47.929) 57.493,48.862 ccw(c56.968,47.919) 57.412,48.903 ccw(c56.963,47.91) 56.964,48.999 52.501,48.999 cw(c52.501,49.199) 52.36,49.057 51.559,49.856 cw(c51.702,50) 51.552,49.864 cw(c51.701,49.999) 51.543,49.874 cw(c51.7,49.998) 51.552,50.132 cw(c51.702,49.995) 51.559,50.139 52.357,50.937 cw(c52.498,50.796) 52.498,50.996 56.964,50.996 ccw(c56.964,52.083) 57.234,51.03 ccw(c56.964,52.085) 57.445,51.108 ccw(c56.969,52.073) 57.513,51.145 ccw(c56.975,52.063) 57.564,51.177 ccw(c56.981,52.054) 57.606,51.206 ccw(c56.987,52.046) 57.643,51.234 ccw(c56.994,52.038) 57.675,51.262 ccw(c57,52.03) 57.705,51.289 ccw(c57.008,52.022) 57.734,51.317 ccw(c57.015,52.015) 57.76,51.345 ccw(c57.022,52.008) 57.785,51.375 ccw(c57.03,52.002) 57.81,51.406 ccw(c57.038,51.996) 57.835,51.439 ccw(c57.046,51.99) 57.859,51.476 ccw(c57.054,51.985) 57.885,51.519 ccw(c57.063,51.98) 57.914,51.575 ccw(c57.072,51.976) 57.987,51.796 ccw(c56.932,52.004) 57.992,51.823 ccw(c56.943,52.002) 57.996,51.849 ccw(c56.954,52) 58,51.878 ccw(c56.964,51.999) 58.003,51.91 ccw(c56.975,51.998) 58.005,51.946 ccw(c56.985,51.998) 58.007,51.987 ccw(c56.996,51.998) 58.006,52.038 ccw(c57.006,51.998) 58.001,52.109 ccw(c57.014,51.998) 57.76,52.654 ccw(c57.004,51.993) 57.346,52.937 ccw(c57.007,51.998) 57.124,52.989 ccw(c57.005,51.985) 57.055,52.995 ccw(c57.005,51.974) 57.005,52.996 53.204,52.996 cw(c53.204,53.199) 53.194,52.996 cw(c53.204,53.197) 53.18,52.997 cw(c53.204,53.196) 53.005,53.186 cw(c53.208,53.196) 53.004,53.196 53.004,56.997 ccw(c51.983,56.997) 53.003,57.048 ccw(c51.993,56.997) 52.997,57.116 ccw(c52.005,56.999) 52.969,57.263 ccw(c52.005,56.998) 52.791,57.616 ccw(c52,56.995) 52.487,57.874 ccw(c52.008,57.008) 52.045,57.998 ccw(c52.006,56.987) 51.993,57.998 ccw(c52.006,56.977) 51.952,57.997 ccw(c52.007,56.966) 51.916,57.994 ccw(c52.008,56.955) 51.884,57.991 ccw(c52.009,56.945) 51.856,57.987 ccw(c52.01,56.934) 51.829,57.983 ccw(c52.012,56.923) 51.804,57.978 ccw(c51.985,57.062) 51.518,57.871 ccw(c51.995,57.044) 51.477,57.846 ccw(c52,57.036) 51.44,57.821 ccw(c52.006,57.028) 51.407,57.796 ccw(c52.012,57.02) 51.376,57.771 ccw(c52.018,57.012) 51.347,57.745 ccw(c52.025,57.005) 51.319,57.718 ccw(c52.033,56.997) 51.291,57.69 ccw(c52.04,56.99) 51.263,57.659 ccw(c52.048,56.983) 51.235,57.624 ccw(c52.057,56.977) 51.206,57.586 ccw(c52.065,56.97) 51.175,57.541 ccw(c52.075,56.965) 51.141,57.484 ccw(c52.084,56.959) 51.101,57.403 ccw(c52.093,56.955) 51.004,56.956 51.004,52.493 cw(c50.804,52.493) 50.946,52.352 50.147,51.55 cw(c50.003,51.694) 50.14,51.543 cw(c50.005,51.692) 50.129,51.534 cw(c50.006,51.692) 49.872,51.543 cw(c50.008,51.694) 49.864,51.55 49.066,52.348 cw(c49.207,52.49) 49.007,52.49 49.007,56.956 ccw(c47.92,56.955) 48.973,57.225 ccw(c47.918,56.955) 48.895,57.436 ccw(c47.931,56.961) 48.858,57.505 ccw(c47.94,56.967) 48.827,57.556 ccw(c47.949,56.972) 48.797,57.598 ccw(c47.957,56.979) 48.769,57.634 ccw(c47.966,56.985) 48.741,57.667 ccw(c47.973,56.992) 48.714,57.697 ccw(c47.981,56.999) 48.686,57.725 ccw(c47.988,57.007) 48.658,57.752 ccw(c47.995,57.014) 48.629,57.777 ccw(c48.001,57.022) 48.597,57.802 ccw(c48.007,57.03) 48.564,57.826 ccw(c48.013,57.038) 48.527,57.851 ccw(c48.018,57.046) 48.484,57.877 ccw(c48.023,57.055) 48.428,57.905 ccw(c48.027,57.064) 48.207,57.979 ccw(c47.999,56.924) 48.18,57.983 ccw(c48.001,56.935) 48.154,57.988 ccw(c48.003,56.945) 48.125,57.991 ccw(c48.004,56.956) 48.093,57.995 ccw(c48.005,56.967) 48.058,57.997 ccw(c48.005,56.977) 48.017,57.998 ccw(c48.006,56.987) 47.965,57.998 ccw(c48.005,56.998) 47.894,57.992 ccw(c48.005,57.005) 47.348,57.75 ccw(c48.011,56.996) 47.068,57.341 ccw(c48.005,56.999) 47.014,57.116 ccw(c48.018,56.997) 47.008,57.046 ccw(c48.029,56.997) 47.007,56.997 47.007,53.196 cw(c46.804,53.196) 47.007,53.185 cw(c46.806,53.196) 47.006,53.172 cw(c46.807,53.196) 46.817,52.996 cw(c46.807,53.199) 46.807,52.996 43.007,52.996 ccw(c43.007,51.975) 42.955,52.995 ccw(c43.006,51.985) 42.888,52.989 ccw(c43.005,51.996) 42.74,52.96 ccw(c43.005,51.996) 42.386,52.781 ccw(c43.008,51.992) 42.13,52.481 ccw(c42.995,51.999) 42.005,52.034 ccw(c43.016,51.998) 42.005,51.983 ccw(c43.027,51.998) 42.006,51.942 ccw(c43.038,51.998) 42.009,51.906 ccw(c43.048,51.999) 42.012,51.874 ccw(c43.059,52.001) 42.016,51.846 ccw(c43.07,52.002) 42.02,51.819 ccw(c43.08,52.004) 42.025,51.796 ccw(c42.941,51.977) 42.132,51.51 ccw(c42.959,51.986) 42.157,51.468 ccw(c42.967,51.992) 42.182,51.432 ccw(c42.975,51.997) 42.207,51.398 ccw(c42.983,52.004) 42.233,51.367 ccw(c42.991,52.01) 42.258,51.338 ccw(c42.999,52.017) 42.285,51.31 ccw(c43.006,52.024) 42.314,51.282 ccw(c43.013,52.032) 42.345,51.254 ccw(c43.02,52.04) 42.379,51.226 ccw(c43.027,52.048) 42.418,51.197 ccw(c43.033,52.057) 42.463,51.167 ccw(c43.039,52.066) 42.519,51.133 ccw(c43.044,52.076) 42.6,51.092 ccw(c43.048,52.085) 43.048,50.996 47.513,50.996 cw(c47.513,50.796) 47.655,50.937 48.453,50.139 cw(c48.309,49.995) 48.46,50.131 cw(c48.311,49.997) 48.469,50.121 cw(c48.312,49.998) 48.46,49.863 cw(c48.309,50) 48.453,49.856 47.651,49.057 cw(c47.51,49.199) 47.51,48.999 43.048,48.999 ccw(c43.048,47.912) 42.778,48.965 ccw(c43.048,47.91) 42.568,48.888 ccw(c43.042,47.922) 42.499,48.851 ccw(c43.037,47.931) 42.449,48.819 ccw(c43.031,47.94) 42.406,48.79 ccw(c43.025,47.949) 42.37,48.762 ccw(c43.018,47.957) 42.337,48.734 ccw(c43.011,47.965) 42.308,48.707 ccw(c43.004,47.972) 42.279,48.679 ccw(c42.997,47.979) 42.253,48.651 ccw(c42.989,47.986) 42.227,48.621 ccw(c42.982,47.993) 42.202,48.59 ccw(c42.974,47.999) 42.178,48.556 ccw(c42.966,48.004) 42.153,48.52 ccw(c42.957,48.01) 42.127,48.477 ccw(c42.949,48.014) 42.098,48.421 ccw(c42.939,48.019) 42.025,48.199 ccw(c43.08,47.991) 42.02,48.172 ccw(c43.068,47.993) 42.016,48.145 ccw(c43.058,47.994) 42.012,48.117 ccw(c43.047,47.996) 42.009,48.085 ccw(c43.037,47.996) 42.006,48.049 ccw(c43.026,47.997) 42.005,48.008 ; 62,44.5 ccw(c63,44.5) 64,44.5 64,48 ccw(c63,48) 62,48 62,44.5 ; 62,52 ccw(c63,52) 64,52 64,55.5 ccw(c63,55.5) 62,55.5 62,52

## Other copper
Layer 1:
  region net RTN: 99,54 93,54 93,46 99,46
  region net RTN: 99,24 93,24 93,16 99,16
  rectangle net RTN: 1,16 7,24
  rectangle net RTN: 1,46 7,54
Layer 2:
  region net RTN: 99,54 93,54 93,46 99,46
  region net RTN: 99,24 93,24 93,16 99,16
  rectangle net RTN: 1,16 7,24
  rectangle net RTN: 1,46 7,54

## Silkscreen, mask and mechanical layers (free items; w line width, h text height)
Top Overlay:
  rectangle: 64,72 88,81
  lines w0.2: 36,58 36,51 36.3,50.6
  text "V0" at 20.001,88.869 h2
  text "V0" at 13.001,87.638 h2
  text "V12" at 13.001,85.128 h2
  text "V12" at 20.001,83.858 h2
  text ".projectproject / PCB P/N .ProjectClientPCBPartNumber / PCB Revision .ProjectPCBRevision / .projectengineer .ProjectEngineerDate / .ProjectClient" at 56,82.881 h3
  text "S/N" at 58,76.04 h3
  text "RTN" at 30.46,62.461 h3 r90
  text "V5" at 71.501,62.371 h2
  text "V5" at 20.944,58.42 h3 r90
  text "V5N" at 7.944,57.509 h3 r90
  text "RTN" at 80.46,57.461 h3 r90
  text "IN" at 7,51.36 h2
  text "OUT" at 89.349,51.36 h2
  text "RTN" at 24.46,42.461 h3 r90
  text "RTN" at 80.46,41.461 h3 r90
  text "V5N" at 71.501,36.371 h2
  text "BYPASS" at 7,21.36 h2
  text "BYPASS" at 86.074,21.36 h2
Mechanical 2:
  drawing of 339 lines, arcs and shapes, not listed

## Dimensions
41,41 to 36.5,37.5 on Mechanical 2
59,41 to 64.5,37.5 on Mechanical 2
59,59 to 64.5,62.5 on Mechanical 2
59,59 to 64.5,62.5 on Mechanical 2
36.5,62.5 to 41,59 on Mechanical 2
41,59 to 36.5,62.5 on Mechanical 2
36.5,62.5 to 39,56 on Mechanical 2
44.5,62.5 to 36.5,62.5 on Mechanical 2
56,56 to 64.5,62.5 on Mechanical 2
62,56 to 64.5,62.5 on Mechanical 2
56,41 to 64.5,37.5 on Mechanical 2
56,41 to 64.5,37.5 on Mechanical 2
39,44 to 36.5,37.5 on Mechanical 2
39,49 to 36.5,37.5 on Mechanical 2
44,41 to 36.5,37.5 on Mechanical 2
62,44 to 64.5,37.5 on Mechanical 2
39,44 to 36.5,37.5 on Mechanical 2

## Text inside footprints (layer, text, board x,y; h text height)
D1: Top Overlay "-" at 17.7,59.4 h0.51 r270; Top Overlay "+" at 17.7,61.1 h0.51 r270
D2: Top Overlay "-" at 9.3,60.6 h0.51 r90; Top Overlay "+" at 9.3,58.9 h0.51 r90
U1: Top Overlay "·" at 30.297,52.94 h5 r270
U2: Top Overlay "·" at 63.358,52.95 h5 r270